# Altium PCB PCB1.PcbDoc (part 2 of 2)
Units mil, origin at the board's own origin, x right, y up, seen from the top; angles counter-clockwise.
Board outline 8130 x 4940 mil, 6 copper layers (Top Layer, TOP_GND, +5V, -5V, BOT_GND, Bottom Layer), stack 32.112 mil thick; 163 components, 155 nets, 814 pads, 428 vias.
Unrouted connection lines stored in the file: 173.
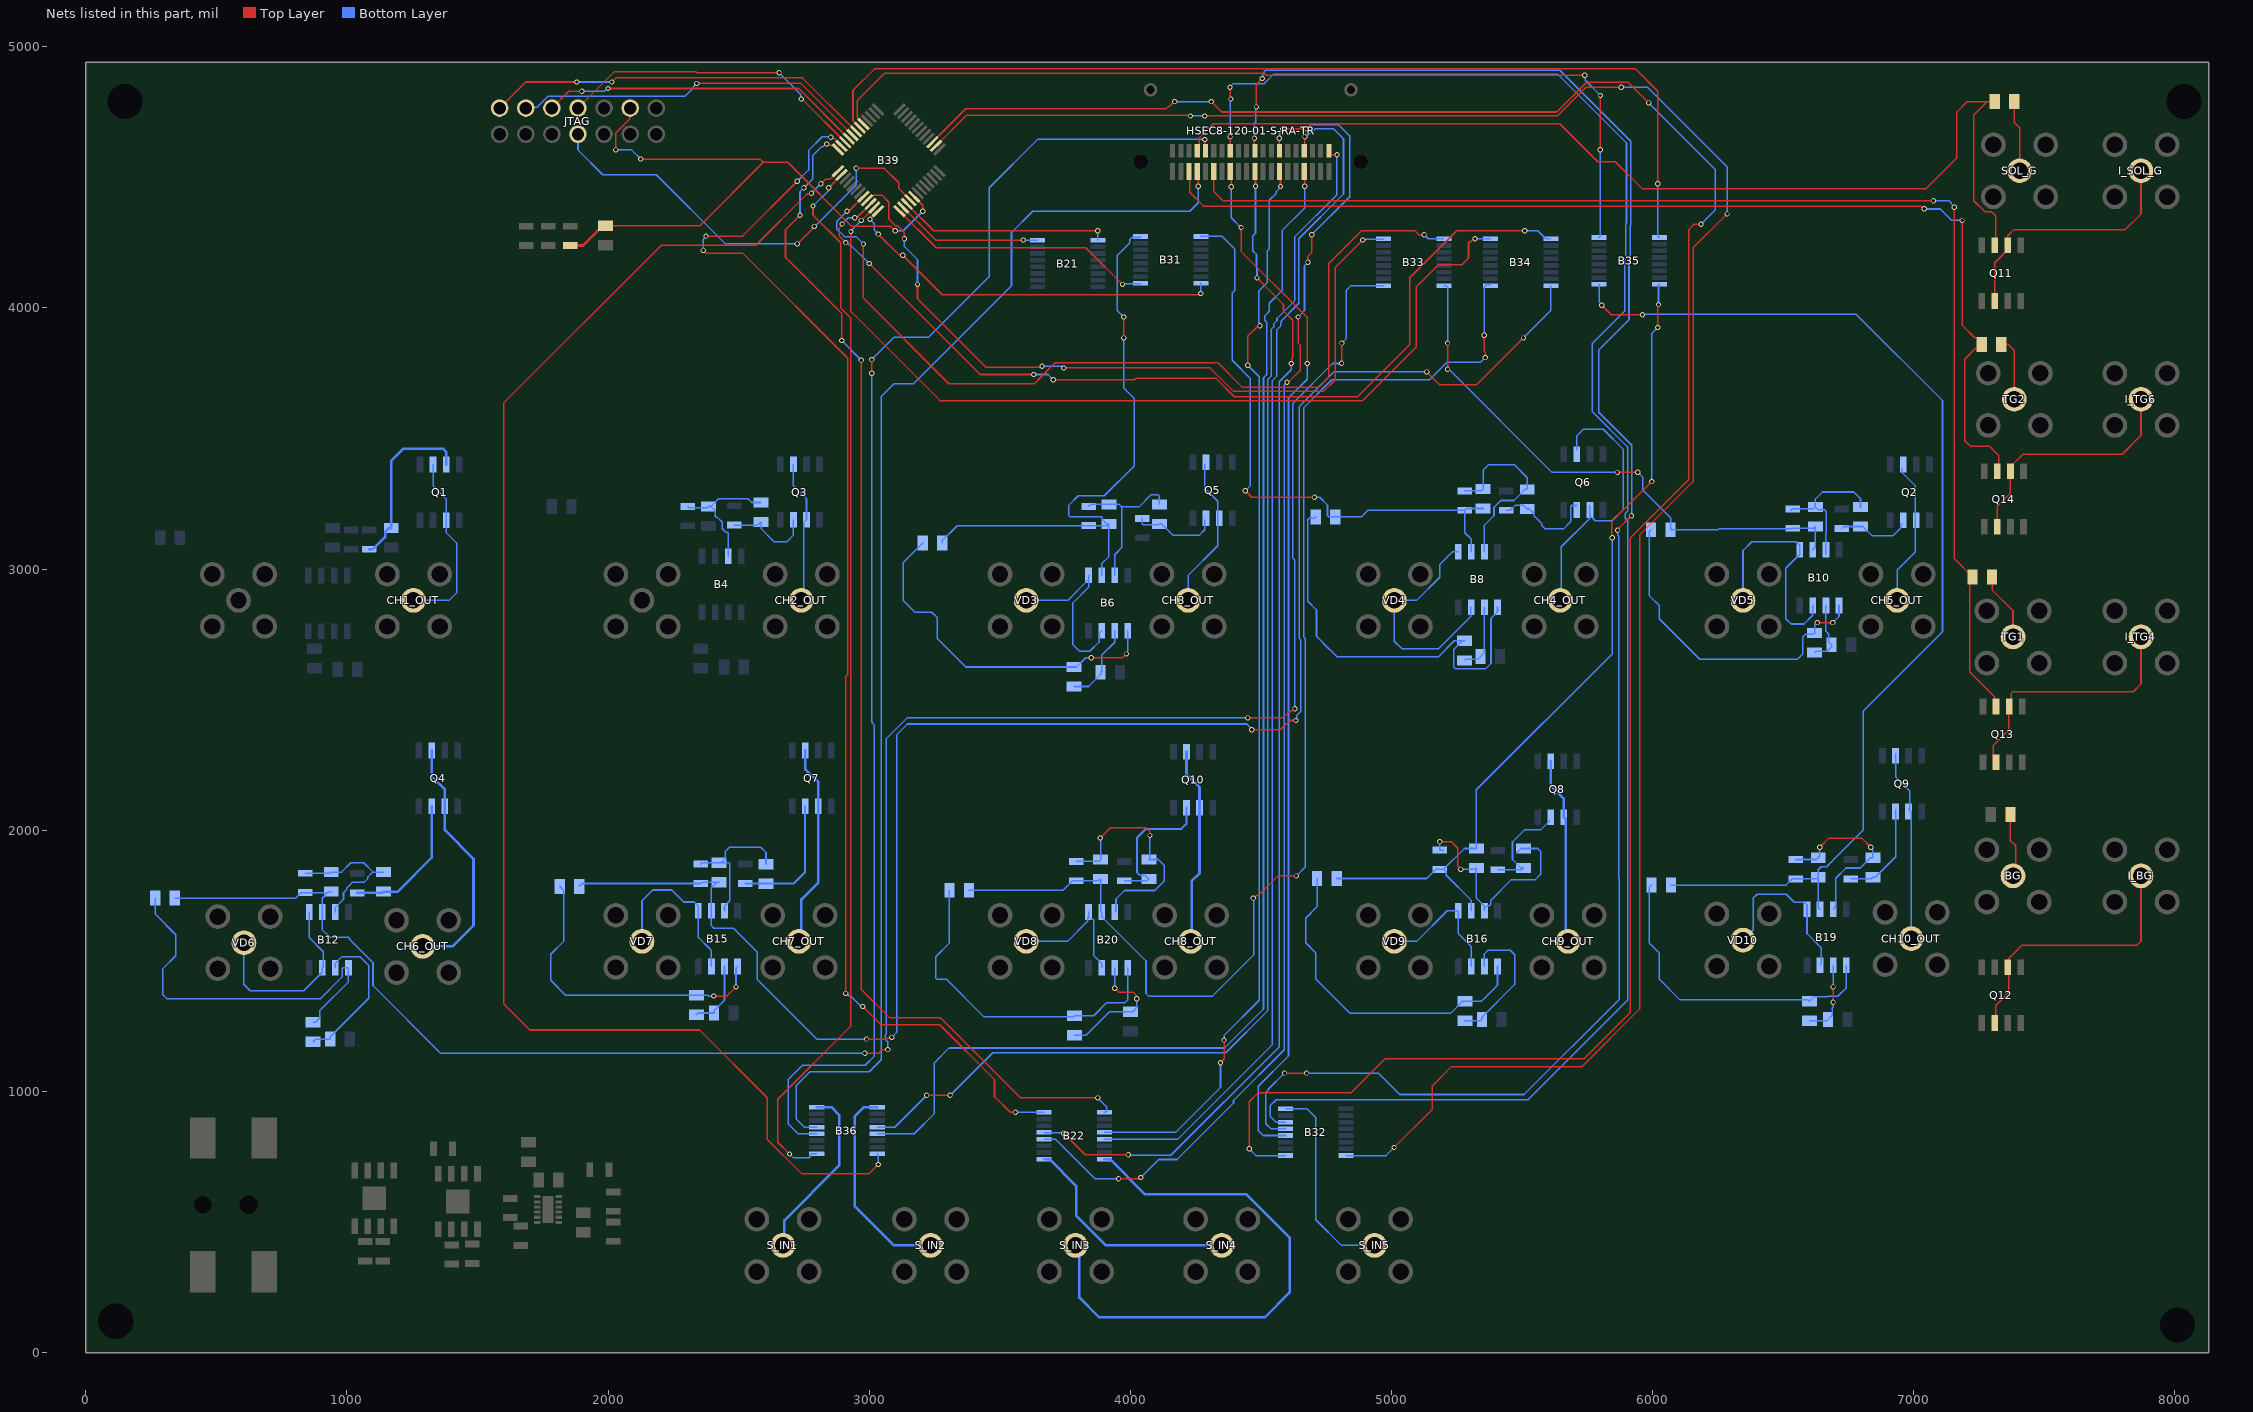
[diagram p6: the nets of this part, all layers, seen from the top]

## Via types
v1: diameter 20, hole 13, Top Layer to Bottom Layer, tented both sides, 428 vias

## Nets (pads, with @x,y where several pads share a name; then routed paths per layer and width w, separated by ;. In a path a pad name is that pad's centre, name@x,y a point inside that pad or via, vN(x,y) a via of type N, cw(c..) or ccw(c..) an arc to the next point about the centre after c; other vN are vias at no path point) (continued)
NetB4_7: B4.7 C9.2 R45.2 R47.1 | length 533.4
  Bottom Layer w6: C9.2@2305,3240 2310,3235 2325,3235 R45.2@2380.2,3235 ; B4.7@2460,3048.54 2460,3137.31 2455,3142.31 2449.34,3142.31 2437.42,3154.23 2437.42,3179.19 2418.93,3197.69 2414.06,3197.69 2410.54,3201.2 2410.54,3223.12 R45.2@2393.86,3239.8 ; R47.1@2585,3254.8 2550.2,3254.8 2536.29,3268.71 2422.76,3268.71 R45.2@2393.86,3239.8 ; R45.2@2380.2,3235 R45.2@2385,3239.8 ; R45.2@2380.2,3235 R45.2@2385,3239.8 ; R45.2@2385,3239.8 R45.2@2393.86,3239.8
NetB6_1: B6.1 R49.1 R51.2 | length 1369.6
  Top Layer w6: v1(3850,2660) 3970,2660 v1(3985,2675)
  Bottom Layer w6: R49.1@3205,3100 3130,3025 3130,2880 3175,2835 3240,2835 3260,2815 3260,2735 3370,2625 R51.2@3785,2625 3793.86,2625 3828.86,2660 v1(3850,2660) ; v1(3985,2675) 3985,2677.71 3990,2682.71 B6.1@3990,2763.23
NetB6_2: B6.2 R51.1 R53.2 | length 309.5
  Bottom Layer w6: R51.1@3785,2550.2 3840.06,2550.2 3886,2596.14 R53.2@3886,2605 3890,2609 3890,2670 3940,2720 B6.2@3940,2763.23
NetB6_3: B6.3 B6.5 VD3.1 | length 735.8
  Bottom Layer w6: VD3.1@3601,2880 3760.45,2880 B6.5@3840,2959.55 ; B6.5@3840,2976.77 B6.5@3840,2959.55 ; B6.3@3890,2763.23 3880.2,2753.43 3880.2,2720.2 3845,2685 3805,2685 3780,2710 3780,2870 3840,2930 B6.5@3840,2959.55
NetB6_6: B6.6 B31.8 C11.1 R49.2 R50.1 | length 2365.7
  Top Layer w6: v1(3975,3885) v1(3975,3965)
  Bottom Layer w6: R49.2@3279.8,3100 3279.8,3108.86 3337.17,3166.22 C11.1@3841,3166.22 3911.7,3166.22 R50.1@3918.19,3172.72 ; B6.6@3890,2976.77 3890,3020 3918.19,3048.19 R50.1@3918.19,3172.72 ; v1(3975,3885) 3975,3693.49 4015,3653.49 4015,3395 3900.2,3280.2 3800.2,3280.2 3765,3245 3765,3203.51 3768.51,3200 3889.49,3200 3893,3196.49 3893,3189.4 3909.69,3172.72 R50.1@3918.19,3172.72 ; v1(3975,3965) 3949.5,3990.5 3949.5,4155.97 3949.7,4156.17 3949.7,4200.63 3997.3,4248.22 3997.3,4262 4004.91,4269.61 4035.6,4269.61 B31.8@4039.33,4273.35
NetB6_7: B6.7 C11.2 R50.2 R52.1 | length 602.9
  Bottom Layer w6: C11.2@3841,3240.24 3848.28,3247.52 R50.2@3918.19,3247.52 3957.48,3247.52 3967.24,3237.76 ; B6.7@3940,2976.77 3940,3055 3967.24,3082.24 3967.24,3237.76 ; R52.1@4111,3247.52 4111,3279 4105,3285 4080,3285 4032.76,3237.76 3967.24,3237.76
NetB8_1: B8.1 R54.1 R56.2 | length 1612.9
  Bottom Layer w6: R54.1@4710.2,3200 4704.81,3194.61 4685.03,3194.61 4679.5,3189.08 4679.5,2876.39 4712.82,2843.07 4712.82,2742.66 4739.01,2716.48 4739.01,2715.99 4790,2665 5180.8,2665 5240.8,2725 R56.2@5271.14,2725 ; R56.2@5280,2725 R56.2@5271.14,2725 ; B8.1@5406,2853.23 5406,2836 5381.14,2811.14 5381.14,2638.52 5360.12,2617.51 5246.07,2617.51 5238.46,2625.13 5238.46,2692.31 R56.2@5271.14,2725
NetB8_2: B8.2 R56.1 R58.2 | length 261.6
  Bottom Layer w6: R56.1@5280,2650.2 5285,2655.2 5331.2,2655.2 R58.2@5341,2665 5356,2680 B8.2@5356,2853.23
NetB8_3: B8.3 B8.5 VD4.1 | length 898.4
  Bottom Layer w6: B8.5@5256,3066.77 5234.2,3066.77 5185.08,3017.65 5185.08,2968.88 5096.2,2880 VD4.1@5011,2880 5011,2724 5040,2695 5180,2695 5302.72,2817.72 5302.72,2849.95 B8.3@5306,2853.23
NetB8_6: B8.6 B31.9 C13.1 R54.2 R55.1 | length 2276.3
  Top Layer w6: v1(4440,3300) 4465,3275 v1(4705,3275)
  Bottom Layer w6: B31.9@4270.67,4273.35 4271.5,4274.17 4349.17,4274.17 4350,4275 4400.5,4224.5 4400.5,4067.49 4390,4056.99 4390,3799.1 4460,3729.1 4460,3320 v1(4440,3300) ; v1(4705,3275) 4725,3275 4755,3245 4755,3203.51 4758.51,3200 R54.2@4785,3200 4885,3200 4910.26,3225.26 C13.1@5281,3225.26 ; B8.6@5306,3066.77 5306,3114 5281,3139 C13.1@5281,3225.26 ; R55.1@5351,3231.75 5287.5,3231.75 C13.1@5281,3225.26
NetB8_7: B8.7 C13.2 R55.2 R57.1 | length 729.9
  Bottom Layer w6: C13.2@5281,3299.27 5343.72,3299.27 R55.2@5351,3306.56 5351,3379 5372,3400 5470,3400 5520,3350 R57.1@5520,3304.8 5511.14,3304.8 5468.83,3262.5 5418.17,3262.5 5392.54,3236.87 5392.54,3204.92 5356,3168.37 B8.7@5356,3066.77
NetB10_1: B10.1 R59.1 R61.2 | length 1277.5
  Top Layer w6: v1(6630,2795) v1(6690,2795)
  Bottom Layer w6: R59.1@5993.89,3150.32 5986.41,3142.84 5986.41,2898.59 6025,2860 6025,2810 6180,2655 6555,2655 6574.73,2674.73 6574.73,2739.73 6585.97,2750.97 6615.97,2750.97 R61.2@6620,2755 6620,2785 v1(6630,2795) ; v1(6690,2795) 6713.5,2818.5 B10.1@6713.5,2860.54
NetB10_2: B10.2 R61.1 R63.2 | length 241.5
  Bottom Layer w6: R61.1@6620,2680.2 6625.49,2685.69 6668.51,2685.69 6685.2,2702.37 R63.2@6685.2,2710 6674.31,2720.88 6674.31,2750.54 6663.5,2761.35 B10.2@6663.5,2860.54
NetB10_3: B10.3 B10.5 VD5.1 | length 894.8
  Bottom Layer w6: VD5.1@6346,2880 6346,3071 6380,3105 6549.81,3105 6563.5,3091.31 B10.5@6563.5,3074.08 6563.5,3056.86 6510,3003.36 6510,2810 6530.5,2789.5 6579.5,2789.5 6613.5,2823.5 B10.3@6613.5,2860.54
NetB10_6: B10.6 B33.8 C15.1 R59.2 R60.1 | length 2147.8
  Top Layer w6: v1(5215,3765) v1(5215,3865.19) ; v1(5865.15,3370.15) 5943.01,3370.15 v1(5943.17,3370.31)
  Bottom Layer w6: B33.8@5200.67,4085.43 5209.14,4085.43 5215,4079.57 v1(5215,3865.19) ; v1(5215,3765) 5220,3765 5615,3370 5865,3370 v1(5865.15,3370.15) ; v1(5943.17,3370.31) 5962.92,3350.55 5962.92,3302.08 6068.69,3196.31 R59.2@6068.69,3150.32 6250.32,3150.32 6255,3155 6534.6,3155 C15.1@6536,3156.4 6616.7,3156.4 R60.1@6623.19,3162.89 6623.19,3083.77 B10.6@6613.5,3074.08
NetB10_7: B10.7 C15.2 R60.2 R62.1 | length 570.2
  Bottom Layer w6: C15.2@6528.35,3222.76 C15.2@6536,3230.41 6615.91,3230.41 R60.2@6623.19,3237.7 ; B10.7@6663.5,3056.86 B10.7@6663.5,3074.08 6663.5,3136.59 6664.73,3137.82 6664.73,3220.27 6657.22,3227.78 6633.11,3227.78 R60.2@6623.19,3237.7 ; R62.1@6796,3237.7 6796,3269 6770,3295 6650,3295 6623.19,3268.19 R60.2@6623.19,3237.7
NetB12_1: B12.1 R64.1 R66.2 | length 1477.4
  Bottom Layer w6: R64.1@266.2,1740 266.2,1678.8 345,1600 345,1519.34 295.66,1470 295.66,1370 311.66,1354 897.97,1354 981.79,1437.82 981.79,1469.71 985.31,1473.22 B12.1@1006,1473.22 1006,1418.67 896.54,1309.22 896.54,1281.69 879.86,1265 R66.2@871,1265
NetB12_2: B12.2 R66.1 R68.2 | length 582.5
  Bottom Layer w6: R66.1@871,1190.2 880.8,1200 R68.2@936.2,1200 936.2,1208.86 1084,1356.66 1084,1481.83 1049.58,1516.24 981.8,1516.24 956,1490.45 B12.2@956,1473.22
NetB12_3: B12.3 B12.5 VD6.1 | length 755.3
  Bottom Layer w6: VD6.1@606,1569.29 605,1568.29 605,1410 630,1385 835,1385 906,1456 B12.3@906,1473.22 910,1477.22 910,1535 856,1589 B12.5@856,1686.77
NetB12_6: B12.6 B33.9 C17.1 R64.2 R65.1 | length 7849
  Top Layer w6: v1(2983.67,1146.33) 3036.33,1146.33 3050,1160 v1(3071,1160) ; v1(4450,2430) 4584.63,2430 4609.27,2454.64 4616.28,2454.64 4626.44,2464.8 v1(4630.23,2464.8) ; v1(4808.92,3787.91) 4809.46,3788.45 4809.46,3844.46 4810,3845 v1(4810,3865.19)
  Bottom Layer w6: R64.2@341,1740 804.45,1740 825.43,1760.98 C17.1@840,1760.98 R65.1@927.13,1760.98 ; R65.1@940,1765 931.14,1765 R65.1@927.13,1760.98 ; v1(2983.67,1146.33) 1358.67,1146.33 1100,1405 1100,1491.97 1010,1581.97 1010,1586.49 1006.49,1590 935,1590 905,1620 905,1685.77 B12.6@906,1686.77 906,1739.86 R65.1@927.13,1760.98 ; v1(3071,1160) 3071,1189.66 3062.08,1198.58 3062.08,1215.46 3066,1219.38 3066,2351 3145,2430 v1(4450,2430) ; v1(4630.23,2464.8) 4630.23,3033.41 4621.73,3041.91 4621.73,3634.25 4774.47,3787 4808.01,3787 v1(4808.92,3787.91) ; v1(4810,3865.19) 4826,3881.19 4826,4066 4845.43,4085.43 B33.9@4969.33,4085.43
NetB12_7: B12.7 C17.2 R65.2 R67.1 | length 570.5
  Bottom Layer w6: C17.2@840,1835 935.2,1835 R65.2@940,1839.8 979.8,1839.8 1015,1875 1065,1875 1100.2,1839.8 ; B12.7@956,1686.77 956,1703.99 987.16,1735.15 987.16,1760.83 999.24,1772.92 999.24,1778.57 1020.67,1800 1065.31,1800 1080.76,1815.44 1080.76,1821.1 1099.46,1839.8 1100.2,1839.8 ; R67.1@1140,1839.8 1100.2,1839.8
NetB15_1: B15.1 R69.1 R73.2 | length 1215.9
  Top Layer w6: v1(2405,1365) 2455,1365 v1(2490,1400)
  Bottom Layer w6: R69.1@1815.2,1785 1829.87,1770.32 1829.87,1574.21 1780.66,1525 1780.66,1425 1837.62,1368.04 R73.2@2338.17,1368.04 2383.04,1368.04 2386.08,1365 v1(2405,1365) ; v1(2490,1400) 2490,1472.22 B15.1@2496,1478.22
NetB15_2: B15.2 R73.1 R76.2 | length 265.4
  Bottom Layer w6: R73.1@2338.17,1293.23 2344.93,1300 R76.2@2406,1300 2406,1308.86 2446,1348.86 B15.2@2446,1478.22
NetB15_3: B15.3 B15.5 VD7.1 | length 665.9
  Bottom Layer w6: VD7.1@2130,1574.29 2130,1730 2171,1771 2243.7,1771 2289.7,1725 2329.99,1725 2346,1708.99 B15.5@2346,1691.77 2346,1641.03 ; 2346,1641 2346,1589 2389.4,1545.59 2396,1539 B15.3@2396,1478.22
NetB15_6: B15.6 B34.8 C19.1 R69.2 R70.1 | length 6853.9
  Top Layer w6: v1(2990,1200) 3065.18,1200 3069.09,1203.91 3083.91,1203.91 v1(3086.59,1206.59) ; v1(4465,2385) 4509.58,2385 4574,2385 4596.36,2407.36 4599.36,2407.36 4612,2420 v1(4634,2420) ; v1(5135,3755) 5185,3705 5325,3705 v1(5505,3885)
  Bottom Layer w6: R69.2@1890,1785 1900.98,1795.98 C19.1@2355,1795.98 2359.21,1800.2 R70.1@2416.14,1800.2 ; R70.1@2425,1800.2 R70.1@2416.14,1800.2 ; v1(2990,1200) 2800,1200 2570.76,1429.24 2570.76,1534.24 2480,1625 2405,1625 2395,1635 2395,1690.77 B15.6@2396,1691.77 2396,1780.06 R70.1@2416.14,1800.2 ; v1(3086.59,1206.59) 3105,1225 3105,2365 3146.68,2406.68 4446.02,2406.68 4465,2387.71 v1(4465,2385) ; v1(4634,2420) 4636.68,2422.68 4636.68,2438.73 4653.23,2455.27 4653.23,2728.06 4647.5,2733.79 4647.5,3623.51 4778.99,3755 v1(5135,3755) ; v1(5505,3885) 5610.67,3990.67 B34.8@5610.67,4085.43
NetB15_7: B15.7 C19.2 R70.2 R75.1 | length 577.7
  Bottom Layer w6: C19.2@2355,1870 2360,1875 R70.2@2425,1875 ; B15.7@2446,1691.77 2446,1708.99 2466.54,1729.54 2466.54,1871.49 2463.03,1875 R70.2@2432.79,1875 ; R75.1@2605,1870 2605,1915 2585,1935 2465,1935 2449.48,1919.48 2449.48,1891.69 R70.2@2432.79,1875 ; R70.2@2425,1875 R70.2@2432.79,1875 ; R70.2@2425,1875 R70.2@2432.79,1875
NetB16_1: B16.1 R71.1 R74.2 | length 1287.2
  Bottom Layer w6: R71.1@4715.2,1815 4715.2,1707.03 4671.41,1663.24 4671.41,1568.59 4710,1530 4710,1430 4840,1300 4840,1298.51 5225.85,1298.51 5272.14,1344.8 R74.2@5281,1344.8 5344.8,1344.8 5406,1406 B16.1@5406,1478.22
NetB16_2: B16.2 R74.1 R78.2 | length 544.4
  Bottom Layer w6: R74.1@5281,1270 5341.2,1270 R78.2@5346.2,1275 5346.2,1283.86 5471.49,1409.15 5471.49,1525 5470,1525 5455,1540 5370,1540 5356,1526 B16.2@5356,1478.22
NetB16_3: B16.3 B16.5 VD9.1 | length 527.9
  Bottom Layer w6: VD9.1@5011,1574.29 5096.2,1574.29 5213.67,1691.77 B16.5@5256,1691.77 5256,1604 5306,1554 B16.3@5306,1478.22
NetB16_6: B16.6 B35.8 C20.1 R71.2 R72.1 | length 3241
  Top Layer w6: v1(5845,3120) 5842.77,3122.23 5842.77,3180.77 v1(5997,3335) ; v1(6020,3925) 6020,4010 v1(6022.5,4012.5) v1@6025,4015
  Bottom Layer w6: R71.2@4790,1815 5135.43,1815 5170.43,1850 C20.1@5185,1850 C20.1@5199.57,1850 ; B16.6@5306,1691.77 5306,1731.18 5209.76,1827.42 5209.76,1839.81 C20.1@5199.57,1850 ; v1(5845,3120) 5845,2675 5325,2155 R72.1@5325,1930 5279.57,1930 C20.1@5199.57,1850 ; v1(5997,3335) 5997,3902 v1(6020,3925) ; v1(6022.5,4012.5) 6022.5,4087.26 B35.8@6025.67,4090.43
NetB16_7: B16.7 C20.2 R72.2 R77.1 | length 951.9
  Top Layer w6: v1(5185,1956.3) 5228.7,1956.3 5253.7,1931.3 5253.7,1861.3 v1(5265,1850)
  Bottom Layer w6: v1(5185,1956.3) C20.2@5185,1924.02 C20.2@5199.57,1924.02 ; v1(5265,1850) 5319.8,1850 R72.2@5325,1855.2 5325,1739.99 5356,1708.99 B16.7@5356,1700.25 ; B16.7@5356,1691.77 B16.7@5356,1700.25 ; B16.7@5356,1700.25 5365.8,1710.05 5374.28,1710.05 5380.2,1715.97 5380.2,1731.27 5460,1811.07 5551.07,1811.07 5571.04,1831.04 5571.04,1918.96 5560,1930 R77.1@5505,1930 ; R77.1@5496.14,1930 R77.1@5505,1930 ; R77.1@5496.14,1930 5479.46,1913.31 R77.1@5496.14,1930 ; R77.1@5496.14,1930 R77.1@5505,1930
NetB19_1: B19.1 R79.1 R83.2 | length 1239.3
  Bottom Layer w6: R79.1@5995.54,1790 5986.41,1780.87 5986.41,1568.59 6025,1530 6025,1430 6105,1350 6596,1350 R83.2@6601,1345 6617.69,1361.69 6666.61,1361.69 6668.93,1364 6709,1364 6741,1396 B19.1@6741,1483.22
NetB19_2: B19.2 R83.1 R86.2 | length 288.6
  Top Layer w6: v1(6691,1341) v1(6691,1399.88)
  Bottom Layer w6: R83.1@6601,1270.2 6666.39,1270.2 R86.2@6671.2,1275 6687.88,1291.69 6687.88,1318.88 6691,1322 v1(6691,1341) ; v1(6691,1399.88) B19.2@6691,1483.22
NetB19_3: B19.3 B19.5 VD10.1 | length 660.7
  Bottom Layer w6: VD10.1@6346,1579.29 6385.76,1619.08 6385.76,1740.45 6400.3,1755 6511.15,1755 6542.36,1723.79 6581.2,1723.79 6591,1713.99 B19.5@6591,1696.77 6591,1604 6645,1550 6645,1487.22 B19.3@6641,1483.22
NetB19_6: B19.6 B35.9 C23.1 R79.2 R80.1 | length 4278.6
  Top Layer w6: v1(5805,4010) 5841.26,3973.74 v1(5961.26,3973.74)
  Bottom Layer w6: B35.9@5794.33,4090.43 5795,4089.76 5795,4022.44 5805,4012.44 v1(5805,4010) ; v1(5961.26,3973.74) 5962.53,3975 6780,3975 7110,3645 7110,2760 6807,2457 6807,2002 6675.85,1870.85 6675.85,1869.93 6668.24,1862.31 6667.31,1862.31 6665.23,1860.23 6645.66,1860.23 6634.31,1848.88 R80.1@6634.31,1820.2 ; R79.2@6070.34,1790 6510.64,1790 6534.34,1813.7 C23.1@6548.91,1813.7 6627.82,1813.7 R80.1@6634.31,1820.2 ; B19.6@6641,1696.77 6634.31,1703.46 R80.1@6634.31,1820.2
NetB19_7: B19.7 C23.2 R80.2 R85.1 | length 696.9
  Top Layer w6: v1(6640,1935) 6675,1970 6800,1970 v1(6835,1935)
  Bottom Layer w6: C23.2@6548.91,1887.72 6627.03,1887.72 R80.2@6634.31,1895 6640,1900.69 v1(6640,1935) ; B19.7@6691,1696.77 6700.8,1706.56 6700.8,1815.69 6740.4,1855.29 6794.97,1855.29 6834.68,1895 R85.1@6843.54,1895 6843.54,1923.76 6835,1932.29 v1(6835,1935)
NetB20_1: B20.1 R81.1 R84.2 | length 1305.6
  Bottom Layer w6: R81.1@3307.31,1770 3307.31,1567.85 3254.46,1515 3254.46,1433.51 3257.98,1430 3295,1430 3440,1285 3781.2,1285 R84.2@3786,1289.8 3859.8,1289.8 3910,1340 3980,1340 3990,1350 B20.1@3990,1473.23
NetB20_2: B20.2 R84.1 R88.2 | length 502.5
  Top Layer w6: v1(3940,1395) 3955,1380 4010,1380 4023.98,1366.02 4023.98,1356.02 v1(4025,1355)
  Bottom Layer w6: R84.1@3786,1215 3830.37,1215 3920.37,1305 4008.86,1305 4025,1321.14 v1(4025,1355) ; v1(3940,1395) B20.2@3940,1473.23
NetB20_3: B20.3 B20.5 VD8.1 | length 525.2
  Bottom Layer w6: VD8.1@3601,1574.29 3759.29,1574.29 3836.27,1651.27 3836.27,1665.81 B20.5@3840,1669.55 ; B20.5@3840,1686.77 B20.5@3840,1669.55 ; B20.3@3890,1473.23 3890,1490.45 3860,1520.45 3860,1656.24 3856.49,1659.75 3849.8,1659.75 B20.5@3840,1669.55
NetB20_6: B20.6 B34.9 C24.1 R81.2 R82.1 | length 4814.8
  Top Layer w6: v1(4471,1740) 4474.76,1740 4486.31,1751.56 4491.56,1751.56 4565,1825 v1(4636,1825) ; v1(5355,3895) 5355,3835 5358.69,3831.31 v1(5358.69,3809.7)
  Bottom Layer w6: R81.2@3382.12,1770 3741.79,1770 3778.19,1806.4 C24.1@3792.76,1806.4 3879.45,1806.4 R82.1@3885.94,1812.89 3885.94,1690.83 B20.6@3890,1686.77 3890,1669.55 4060,1499.55 4060,1375 4070,1365 4315,1365 4472,1522 4472,1739 v1(4471,1740) ; v1(4636,1825) 4669.23,1858.23 4669.23,2734.69 4663.5,2740.41 4663.5,3616.88 4771.62,3725 5146.01,3725 5213.51,3792.5 5341.49,3792.5 v1(5358.69,3809.7) ; v1(5355,3895) 5355,4079.57 5364.59,4089.17 B34.9@5380,4089.17
NetB20_7: B20.7 C24.2 R82.2 R87.1 | length 894.3
  Top Layer w6: v1(3885,1970) 3925,2010 4060,2010 4075,1995 v1(4075,1980)
  Bottom Layer w6: C24.2@3792.76,1880.41 3878.66,1880.41 R82.2@3885.94,1887.7 3885.94,1969.06 v1(3885,1970) ; B20.7@3940,1686.77 3945,1691.77 3945,1736.49 3977.51,1769 4093.47,1769 4130,1805.53 4130,1865 4107.3,1887.7 R87.1@4070.75,1887.7 4075,1891.95 v1(4075,1980)
NetB21_1: B21.1 B39.3 | length 809.2
  Top Layer w6: B39.3@3144.26,4398.3 3247.56,4295 v1(3875,4295)
  Bottom Layer w6: v1(3875,4295) 3875.67,4294.33 B21.1@3875.67,4259.57
NetB21_16: B21.16 B39.2 | length 566.3
  Top Layer w6: B39.2@3130.34,4384.38 3255.43,4259.29 3589.29,4259.29 v1(3590,4260)
  Bottom Layer w6: v1(3590,4260) 3590.22,4259.78 3644.11,4259.78 B21.16@3644.33,4259.57
NetB22_1: B22.1 B39.36 | length 4633
  Top Layer w6: v1(2735,4355) 2679.5,4299.5 2679.5,4193.78 2895,3978.28 v1(2895,3875) ; v1(2837.78,4627.5) 2841.57,4627.5 2846.29,4622.78 2864.11,4622.78 B39.36@2880.46,4606.42 ; v1(2970,3800) 2970,1390 3077.5,1282.5 3272.5,1282.5 3580,975 v1(3875,975)
  Bottom Layer w6: v1(2735,4355) 2735,4445 v1(2750,4460) 2784,4494 2784,4584 2817.09,4617.09 2823.58,4617.09 2834,4627.5 v1(2837.78,4627.5) ; v1(2895,3875) v1(2970,3800) ; v1(3875,975) 3910,940 3910,925.43 3904.14,919.57 B22.1@3901.21,919.57
NetB22_8: B22.8 S_IN3.1 | length 2124.9
  Bottom Layer w10: S_IN3.1@3790,410 3805,395 3805,210 3880,135 4515,135 4610,230 4610,440 4444.21,605.79 4056.03,605.79 3921.39,740.43 B22.8@3901.21,740.43
NetB22_9: B22.9 S_IN4.1 | length 883.1
  Bottom Layer w10: B22.9@3669.87,740.43 3690.05,740.43 3792.69,637.8 3792.69,524.94 3907.63,410 S_IN4.1@4350,410
NetB22_16: B22.16 B39.35 | length 4939.5
  Top Layer w6: v1(2365,4220) 2375,4210 2515,4210 2918,3807 2918,2596.64 2910.5,2589.14 v1(2910.5,1375) ; v1(2375,4275) 2515,4275 v1(2725,4485) ; v1(2853.45,4653.09) 2856.12,4650.41 2864.32,4650.41 B39.35@2894.38,4620.34 ; v1(2975,1325) 3045,1255 3270,1255 3480,1045 3480,980 3540,920 v1(3560,920)
  Bottom Layer w6: v1(2365,4220) 2365,4262.56 2375,4272.56 v1(2375,4275) ; v1(2725,4485) 2768,4528 2768,4603 2820,4655 2851.53,4655 v1(2853.45,4653.09) ; v1(2910.5,1375) 2914.29,1375 2925.09,1364.19 2930.81,1364.19 2970,1325 v1(2975,1325) ; v1(3560,920) 3560.22,919.78 3669.66,919.78 B22.16@3669.87,919.57
NetB31_1: B31.1 B39.1 | length 1040.4
  Top Layer w6: B39.1@3116.42,4370.46 3256.39,4230.5 3829.5,4230.5 v1(3970,4090)
  Bottom Layer w6: v1(3970,4090) 3971.72,4091.72 4037.5,4091.72 B31.1@4039.22,4090
NetB31_16: B31.16 B39.48 | length 1486.5
  Top Layer w6: v1(3003.29,4339.23) 3003.29,4339.71 3033.58,4369.99 B39.48@3033.58,4370.46 ; v1(3035,4282.47) 3113.46,4204.02 3126.25,4204.02 v1(3128.93,4201.34) 3280.27,4050 4262.56,4050 4267.56,4055 v1(4270,4055)
  Bottom Layer w6: v1(3003.29,4339.23) 3019.15,4323.38 3019.15,4298.33 v1(3035,4282.47) ; v1(4270,4055) 4270,4093.54 B31.16@4270.67,4094.21
NetB32_1: B32.1 B39.15 | length 8573.2
  Top Layer w6: B39.15@3241.7,4634.26 3369.75,4762.31 4135.93,4762.31 4137.59,4763.66 v1(4170,4790) ; v1(4310,4790) 4350,4750 5633.03,4750 5747.53,4864.5 5905.5,4864.5 v1(5985,4785) ; v1(4455,780) 4455,960 4488.96,993.96 4843.96,993.96 4974.97,1124.97 5737.34,1124.97 5915,1302.63 5915,3120 6139,3344 6139,4300.62 6158.38,4320 v1(6185,4320)
  Bottom Layer w6: v1(4170,4790) v1(4310,4790) ; v1(4455,780) 4480.79,754.21 B32.1@4594.33,754.21 ; v1(5985,4785) 6240,4530 6240,4375 v1(6185,4320)
NetB32_8: B32.8 S_IN5.1 | length 786.8
  Bottom Layer w6: B32.8@4594.33,933.35 4676.65,933.35 4710,900 4710,508.45 4808.45,410 S_IN5.1@4935,410
NetB32_16: B32.16 B39.14 | length 8023.4
  Top Layer w6: B39.14@3255.62,4620.34 3372.16,4736.88 4228.12,4736.88 v1(4230,4735) ; v1(4285,4735) 5635,4735 5745,4845 v1(5880,4845) ; v1(5010,785) 5155.96,930.96 5155.96,1020.96 5230,1095 5730,1095 5950,1315 5950,3130 6155,3335 6155,4230 v1(6285,4360)
  Bottom Layer w6: v1(4230,4735) v1(4285,4735) ; B32.16@4825.67,754.21 4979.21,754.21 v1(5010,785) ; v1(5880,4845) 5980,4845 6285,4540 v1(6285,4360)
NetB33_1: B33.1 B39.44 | length 3451
  Top Layer w6: v1(2915,4370) 2921.76,4370 B39.44@2977.9,4426.14 ; v1(2977.9,4244.57) 2977.9,4037.1 3305,3710 3632.58,3710 3660.5,3737.92 3660.5,3738.08 3711.92,3789.5 4335.5,3789.5 4429.5,3695.5 4720.5,3695.5 4760,3735 4760,4170 4885,4295 5090,4295 5106.21,4278.79 5123.79,4278.79 v1(5125,4280)
  Bottom Layer w6: v1(2915,4370) 2875,4330 2875,4303.51 2905.28,4273.23 2949.24,4273.23 v1(2977.9,4244.57) ; v1(5125,4280) 5140.43,4264.57 B33.1@5200.67,4264.57
NetB33_16: B33.16 B39.45 | length 2956.1
  Top Layer w6: B39.45@2991.82,4412.22 2995.93,4412.22 3015.71,4432.01 3047.99,4432.01 3049.98,4430.02 3075,4405 3075,4340 3100.5,4314.5 3108.08,4314.5 3135,4287.58 v1(3135,4265) ; v1(3185,4090) 3185,4035 3445,3775 3445,3773.51 3658.51,3773.51 v1(3661.76,3776.76) v1@3665,3780 ; v1(3745,3770) 4305,3770 4395,3680 4740,3680 4785,3725 4785,4155 v1(4890,4260)
  Bottom Layer w6: v1(3135,4265) 3135,4235 3185,4185 v1(3185,4090) ; v1(3661.76,3776.76) 3738.24,3776.76 v1(3745,3770) ; v1(4890,4260) 4892.28,4262.28 4967.05,4262.28 B33.16@4969.33,4264.57
NetB34_1: B34.1 B39.46 | length 3601.6
  Top Layer w6: v1(2896.21,4321.21) 2896.21,4317.42 2885,4306.21 2885,4275.5 v1(2910.5,4250) ; v1(2945,4345) 2952.42,4345 B39.46@3005.74,4398.3 ; v1(3000,4170) 3425,3745 v1(3630,3745) ; v1(3705,3725) 4015.91,3725 4020.91,3730 4328.03,3730 4398.03,3660 4870,3660 5070,3860 5070,4115 5250,4295 v1(5510,4295)
  Bottom Layer w6: v1(2896.21,4321.21) 2920,4345 v1(2945,4345) ; v1(2910.5,4250) 2914.29,4250 2925.09,4239.19 2930.81,4239.19 v1(3000,4170) ; v1(3630,3745) 3685,3745 v1(3705,3725) ; v1(5510,4295) 5560.06,4295 5590.49,4264.57 B34.1@5610.67,4264.57
NetB34_16: B34.16 B39.47 | length 3452.9
  Top Layer w6: v1(2930,4292.73) 2930,3986.31 3271.31,3645 4890,3645 5095,3850 5095,4080 5180.94,4165.94 5270.94,4165.94 5295,4190 5295,4250 5299.24,4254.24 5305.45,4254.24 5316.21,4265 v1(5320,4265) ; v1(2970,4335) 2970.14,4335 3019.52,4384.38 B39.47@3019.66,4384.38
  Bottom Layer w6: v1(2930,4292.73) 2930,4295 v1(2970,4335) ; v1(5320,4265) 5320.22,4264.78 5379.11,4264.78 B34.16@5379.33,4264.57
NetB35_1: B35.1 B39.30 | length 3867.7
  Top Layer w6: B39.30@2963.98,4689.94 2963.98,4691.04 2938.11,4716.91 2938.11,4833.11 3020,4915 5935,4915 6020,4830 v1(6020,4475)
  Bottom Layer w6: v1(6020,4475) 6020,4275.24 B35.1@6025.67,4269.57
NetB35_16: B35.16 B39.29 | length 3580.3
  Top Layer w6: B39.29@2977.9,4703.86 2977.9,4704.96 2954.11,4728.75 2954.11,4794.11 3058,4898 4513.08,4898 4520.58,4890.5 v1(5740,4890.5) ; v1(5799.26,4605.67) 5799.26,4654.5 5800,4655.24 v1(5800,4813.5)
  Bottom Layer w6: v1(5740,4890.5) 5742,4888.5 5742,4871.5 v1(5800,4813.5) ; B35.16@5794.33,4269.57 5799.26,4274.5 v1(5799.26,4605.67)
NetB36_1: B36.1 B39.38 | length 4110.1
  Top Layer w6: v1(2695,760) 2650,805 2650,970 2930,1250 2930,3960.25 2891,3999.25 2891,4249 2785,4355 v1(2785,4390) ; v1(2845,4460) 2845,4460.14 2894.38,4509.52 B39.38@2894.38,4509.66
  Bottom Layer w6: v1(2695,760) 2710,745 2769.78,745 2773.3,748.51 2773.3,754.57 2779.15,760.43 B36.1@2799.33,760.43 ; v1(2785,4390) 2843.09,4448.09 2843.09,4458.09 v1(2845,4460)
NetB36_8: B36.8 S_IN1.1 | length 687
  Bottom Layer w10: S_IN1.1@2670,410 2675,415 2675,506.28 2885,716.28 2885,910 2855.43,939.57 B36.8@2799.33,939.57
NetB36_9: B36.9 S_IN2.1 | length 797.4
  Bottom Layer w10: B36.9@3030.67,939.57 2979.57,939.57 2945,905 2945,559.52 3094.52,410 S_IN2.1@3235,410
NetB36_16: B36.16 B39.37 | length 5803.2
  Top Layer w6: v1(2778.71,4438.71) 2776.03,4436.03 2761.85,4436.03 2565.82,4240 2204.54,4240 1600,3635.46 1600,1335 1700,1235 2350.46,1235 2610,975.46 2610,816.01 2741.01,685 3000,685 v1(3035,720) ; v1(2815,4475) 2831.91,4491.91 2848.8,4491.91 B39.37@2880.46,4523.58
  Bottom Layer w6: v1(2778.71,4438.71) v1(2815,4475) ; B36.16@3030.67,760.43 3035,756.1 v1(3035,720)
NetB39_4: B39.4 JTAG.8 | length 1705.8
  Top Layer w6: v1(2725,4245) 2789.51,4309.51 v1(2789.51,4312.15) ; v1(2950,4535) 3056.94,4535 3112.87,4479.07 3112.87,4457.59 3158.18,4412.27 B39.4@3158.18,4412.22
  Bottom Layer w6: JTAG.8@1885,4665 1885,4605 1980,4510 2185,4510 2450,4245 v1(2725,4245) ; v1(2789.51,4312.15) 2792.15,4312.15 2800,4320 2800.46,4320 2950,4469.54 v1(2950,4535)
NetB39_5: B39.5 C44.1 JTAG.3 R37.2 | length 2458.6
  Top Layer w6: R37.2@1990,4315 2351.93,4315 2594.21,4557.28 ; v1(2030,4605) 2030,4670.1 2082.4,4722.5 2082.4,4762.4 JTAG.3@2085,4765 ; v1(2125,4570) 2581.49,4570 2594.21,4557.28 ; v1(3100,4295) 3083,4312 2933,4312 2687.72,4557.28 2594.21,4557.28 ; B39.5@3172.1,4426.14 3205.05,4393.2 v1(3205.05,4370.05)
  Top Layer w10: C44.1@1854.55,4238.8 1904.94,4238.8 1981.14,4315 R37.2@1990,4315
  Bottom Layer w6: v1(2030,4605) 2090,4605 v1(2125,4570) ; v1(3100,4295) 3130,4295 v1(3205.05,4370.05)
NetBG_1: BG.1 R2.1 | length 247.4
  Top Layer w6: R2.1@7370,2060 7370,1960 7390,1940 7390,1835 BG.1@7380,1825
NetC8_1: C8.1 Q1.3 R42.2 | length 669.9
  Bottom Layer w10: C8.1@1085,3075.98 1099.57,3075.98 1146.46,3122.87 1146.46,3142.6 1161.14,3157.28 R42.2@1170,3157.28 1170,3415 1215,3460 1369.14,3460 1380,3449.14 Q1.3@1380,3400.32
NetC10_1: C10.1 Q3.3 R47.2 | length 346.1
  Bottom Layer w6: C10.1@2482.48,3168.5 2573.5,3168.5 2580.15,3175.15 R47.2@2585,3180 2585.92,3179.08 2585.92,3154.83 2635.75,3105 2685,3105 2710,3130 Q3.3@2710,3188.23
NetC12_1: C12.1 Q5.3 R52.2 | length 328.7
  Bottom Layer w6: C12.1@4045,3194.02 4045,3172.53 4048.51,3169.02 4107.3,3169.02 R52.2@4111,3172.72 4119.86,3172.72 4162.57,3130 4265,3130 4285,3150 Q5.3@4285,3188.23
NetC14_1: C14.1 Q6.3 R57.2 | length 395.2
  Bottom Layer w6: C14.1@5440,3225 5454.57,3225 5473.24,3243.67 5506.33,3243.67 R57.2@5520,3230 5527.79,3230 5544.48,3213.31 5544.48,3205.52 5575.8,3174.2 5575.8,3167.18 5589.16,3153.82 5658.82,3153.82 5685.8,3180.8 5685.8,3239.71 5689.31,3243.23 Q6.3@5710,3243.23
NetC16_1: C16.1 Q2.3 R62.2 | length 282.4
  Bottom Layer w6: Q2.3@6955,3173.23 6950.2,3168.43 6950.2,3157.23 6920.97,3128 6839.75,3128 6804.86,3162.89 R62.2@6796,3162.89 C16.1@6731.91,3162.89 ; C16.1@6731.91,3162.89 C16.1@6725,3155.98 C16.1@6731.91,3162.89
NetC18_1: C18.1 Q4.3 R67.2 | length 538.1
  Bottom Layer w10: C18.1@1040,1760 1135,1760 R67.2@1140,1765 1183.54,1765 1184.4,1764.14 1194.14,1764.14 1325,1895 Q4.3@1325,2091.46
NetC21_1: C21.1 Q7.3 R75.2 | length 509.7
  Bottom Layer w6: C21.1@2525,1795.98 2605,1795.98 R75.2@2614.65,1795.98 ; R75.2@2605,1795.2 R75.2@2614.65,1795.2
  Bottom Layer w8: R75.2@2614.65,1795.2 2710.2,1795.2 2755,1840 Q7.3@2755,2091.46
NetC22_1: C22.1 Q8.3 R77.2 | length 399.7
  Bottom Layer w6: C22.1@5407.81,1848.7 5498.5,1848.7 R77.2@5505,1855.2 5496.14,1855.2 5463.46,1887.88 5463.46,1955.07 5509.38,2000.99 5570.28,2000.99 Q8.3@5606.84,2037.55
NetC26_1: C26.1 Q9.3 R85.2 | length 388.2
  Bottom Layer w6: C26.1@6758.14,1813.7 6837.04,1813.7 R85.2@6843.54,1820.2 6852.39,1820.2 6931,1898.8 Q9.3@6931,2078.93
NetC27_1: C27.1 Q10.3 R87.2 | length 558
  Bottom Layer w6: C27.1@3977.56,1806.4 4064.25,1806.4 R87.2@4070.75,1812.89 4056.85,1826.8 4036.72,1826.8 4033.94,1829.58 4025,1838.51
  Bottom Layer w8: 4025,1838.51 4025,1970 4060,2005 4195,2005 4215,2025 Q10.3@4215,2086.46
NetCH1_OUT_1: CH1_OUT.1 Q1.2 Q1.6 | length 705.9
  Bottom Layer w6: CH1_OUT.1@1255,2880 1391.49,2880 1420,2908.51 1420,3100 1380,3140 Q1.6@1380,3186.77 1380,3268.51 1330,3318.51 Q1.2@1330,3400.32
NetCH2_OUT_1: CH2_OUT.1 Q3.2 Q3.6 | length 550.8
  Bottom Layer w6: Q3.6@2710,3401.77 2710,3320 2760,3270 Q3.2@2760,3188.23 2750.2,3178.43 2750.2,2890.2 CH2_OUT.1@2740,2880
NetCH3_OUT_1: CH3_OUT.1 Q5.2 Q5.6 | length 589.7
  Bottom Layer w6: CH3_OUT.1@4221,2880 4221,2975.58 4335,3089.58 4335,3188.23 4335,3260 4285,3310 Q5.6@4285,3401.77
NetCH4_OUT_1: CH4_OUT.1 Q6.2 Q6.6 | length 1068
  Bottom Layer w6: CH4_OUT.1@5646,2880 5650,2884 5650,3085 5760,3195 Q6.2@5760,3205 ; Q6.6@5710,3456.77 5710,3510 5735,3535 5810.83,3535 5888.15,3457.67 5888.15,3228.15 5845,3185 5780,3185 Q6.2@5760,3205 ; Q6.2@5760,3243.23 Q6.2@5760,3205
NetCH5_OUT_1: CH5_OUT.1 Q2.2 Q2.6 | length 556.1
  Bottom Layer w6: CH5_OUT.1@6936,2880 6936,2995.08 7005,3064.08 7005,3173.23 7005,3319.55 6955,3369.55 Q2.6@6955,3386.77
NetCH6_OUT_1: CH6_OUT.1 Q4.2 Q4.6 | length 964.4
  Bottom Layer w10: CH6_OUT.1@1290,1555 1405,1555 1485,1635 1485,1890 1375,2000 Q4.2@1375,2091.46 1375,2155 1325,2205 Q4.6@1325,2305
NetCH7_OUT_1: CH7_OUT.1 Q7.2 Q7.6 | length 782.1
  Bottom Layer w10: CH7_OUT.1@2731,1574.29 2740,1583.29 2740,1735 2805,1800 Q7.2@2805,2091.46 2805,2185 2755,2235 Q7.6@2755,2305
NetCH8_OUT_1: CH8_OUT.1 Q10.2 Q10.6 | length 760.5
  Bottom Layer w10: Q10.6@4215,2300 4215,2215 4265,2165 Q10.2@4265,2086.46 4265,1835 4235,1805 4235,1578.29 CH8_OUT.1@4231,1574.29
NetCH9_OUT_1: CH9_OUT.1 Q8.2 Q8.6 | length 716.6
  Bottom Layer w10: Q8.6@5610,2263.54 5610,2170 5660,2120 Q8.2@5660,2050 5667.8,2042.2 5667.8,1582.5 CH9_OUT.1@5676,1574.29
NetCH10_OUT_1: CH10_OUT.1 Q9.2 Q9.6 | length 735.2
  Bottom Layer w6: Q9.6@6931,2292.48 6931,2204 6985,2150 6985,2082.93 6981,2078.93 6990,2069.93 CH10_OUT.1@6990,1585
NetI_BG_1: I_BG.1 Q12.2 Q12.6 | length 1059.9
  Top Layer w6: Q12.6@7313.9,1253.23 7313.9,1328.9 7363.9,1378.9 7363.9,1466.77 7363.9,1508.9 7415,1560 7855,1560 7870,1575 I_BG.1@7870,1825
NetI_SOL_G_1: I_SOL_G.1 Q11.2 Q11.6 | length 980.3
  Top Layer w6: Q11.6@7310,4026.46 7310,4172.78 7360,4222.78 7360,4276.49 7383.51,4300 7810,4300 7870,4360 I_SOL_G.1@7870,4525
NetI_TG4_1: I_TG4.1 Q13.2 Q13.6 | length 989.8
  Top Layer w6: Q13.6@7313.9,2258.23 7305,2267.13 7305,2325 7363.9,2383.9 7363.9,2471.77 7373.69,2481.57 7373.69,2525.18 7378.51,2530 7840,2530 7870,2560 I_TG4.1@7870,2740
NetI_TG6_1: I_TG6.1 Q14.2 Q14.6 | length 939
  Top Layer w6: Q14.6@7320,3161.46 7320,3240 7370,3290 Q14.2@7370,3375 7370,3392.22 7417.78,3440 7797.8,3440 7870,3512.2 I_TG6.1@7870,3650
NetR1_1: R1.1 SOL_G.1 | length 273.4
  Top Layer w6: R1.1@7384.8,4790 7384.8,4710.2 7405,4690 SOL_G.1@7405,4525
NetR3_1: R3.1 TG1.1 | length 263.2
  Top Layer w6: R3.1@7299.8,2970 7299.8,2920.2 7380,2840 TG1.1@7380,2740
NetR6_1: R6.1 TG2.1 | length 246.3
  Top Layer w6: R6.1@7335,3860 7361.61,3860 7385,3836.61 TG2.1@7385,3650
S1: B36.4 HSEC8-120-01-S-RA-TR.31 | length 5201.2
  Top Layer w6: v1(3010,3750) v1(3010,3802) ; v1(4285,4645) 4285,4604.65 HSEC8-120-01-S-RA-TR.31@4287.91,4601.73
  Bottom Layer w6: B36.4@2799.33,837.2 2727.8,837.2 2690,875 2690,1045 2745,1100 2985,1100 3020,1135 3020,2403.17 3010,2413.17 v1(3010,3750) ; v1(3010,3802) 3096.37,3888.37 3228.37,3888.37 3460,4120 3460,4460 3645,4645 v1(4285,4645)
S2: B36.13 HSEC8-120-01-S-RA-TR.8 | length 5076.9
  Top Layer w6: HSEC8-120-01-S-RA-TR.8@4665.87,4522.99 4665.87,4509.81 4667.78,4507.9 4667.78,4460.17 v1(4667.78,4465.47)
  Bottom Layer w6: B36.13@3030.67,837.2 3172.2,837.2 3250,915 3250,1110 3306,1166 4360.7,1166 4510,1315.3 4510,3732.88 4523,3745.88 4523,3943.93 4519.04,3947.89 4519.04,3948.7 4516.68,3951.06 4516.68,3951.38 4515.51,3952.55 4515.51,3970.47 4521.07,3976.03 4532,3986.97 4532,4017.46 4581,4066.46 4581,4296 4667.78,4382.78 v1@4667.78,4460.17
S3: B22.4 HSEC8-120-01-S-RA-TR.14 | length 4164.4
  Top Layer w6: v1(4345.15,1109.85) 4360,1124.7 4360,1195 v1(4358.59,1196.41) ; v1(4450,3780) 4450,3891.96 4485.61,3927.56 4487.82,3927.56 4492.26,3932 v1(4496.04,3932) ; HSEC8-120-01-S-RA-TR.14@4571.38,4522.99 4571.38,4511.18 4573.98,4508.58 4575,4507.56 v1(4575,4465)
  Bottom Layer w6: B22.4@3901.21,842.8 4172.8,842.8 4345.15,1015.15 v1(4345.15,1109.85) ; v1(4358.59,1196.41) 4360.41,1198.24 4360.41,1215.41 4494,1349 4494,3736 v1(4450,3780) ; v1(4496.04,3932) 4493.37,3934.68 4493.37,3941.07 4491.92,3942.51 4491.92,4065.06 4524,4097.14 4524,4218 4532,4226 4532,4412 4559.44,4439.44 4559.44,4445.66 4575,4461.21 v1(4575,4465)
S4: B22.13 HSEC8-120-01-S-RA-TR.20 | length 4551.7
  Top Layer w6: v1(3745,840) 3827.5,757.5 v1(3992.5,757.5) ; HSEC8-120-01-S-RA-TR.20@4476.89,4522.99 4476.89,4510.89 4479.34,4508.44 v1(4479.34,4465.58) ; v1(4485,4115) 4546.5,4053.5 4586.57,4013.43 4586.57,3988.38 4622.14,3952.8 4622.14,3809 4618.49,3805.35 4618.49,3789.68 v1(4615.81,3787)
  Bottom Layer w6: B22.13@3669.87,842.8 3671.27,841.4 3743.6,841.4 v1(3745,840) ; v1(3992.5,757.5) 3995,755 4155,755 4570,1170 4570,3717.53 4615.81,3763.34 v1(4615.81,3787) ; v1(4479.34,4465.58) 4479.34,4285.53 4469,4275.19 4469,4218.37 4483,4204.37 4483,4156.51 4485,4154.51 v1(4485,4115)
S5: B32.4 HSEC8-120-01-S-RA-TR.26 | length 3985.2
  Top Layer w6: HSEC8-120-01-S-RA-TR.26@4382.4,4522.99 4382.4,4510.86 4386.51,4506.76 v1(4386.51,4463.5) ; v1(4424,4307.97) 4424,4215.51 4550.37,4089.14 4550.86,4089.14 4677.23,3962.77 v1(4677.23,3787)
  Bottom Layer w6: v1(4386.51,4463.5) 4386.51,4345.47 v1(4424,4307.97) ; B32.4@4594.33,830.98 4509.02,830.98 4490,850 4490,1020 4605.73,1135.73 4605.73,3655.73 4677.23,3727.23 v1(4677.23,3787)
S6: B36.5 HSEC8-120-01-S-RA-TR.34 | length 4894.5
  Top Layer w6: HSEC8-120-01-S-RA-TR.34@4256.42,4522.99 4256.42,4511.18 4259.02,4508.58 4260,4507.6 v1(4260,4465.47) v1@4260,4460
  Bottom Layer w6: B36.5@2799.33,862.8 2752.2,862.8 2720,895 2720,1021.49 2773.51,1075 3000,1075 3046.08,1121.08 3046.08,3661.08 3095,3710 3170,3710 3545,4085 3545,4289.11 3625.95,4370.06 4227.44,4370.06 4260,4402.63 v1(4260,4465.47)
S7: B36.12 HSEC8-120-01-S-RA-TR.1 | length 5112
  Top Layer w6: v1(3220,985) v1(3310,985) ; HSEC8-120-01-S-RA-TR.1@4760.35,4601.73 4760.35,4589.92 4762.95,4587.32 4764.23,4586.04 v1(4791.52,4586.04)
  Bottom Layer w6: B36.12@3030.67,862.8 3097.8,862.8 v1(3220,985) ; v1(3310,985) 3473.07,1148.07 4365.4,1148.07 4526.75,1309.43 4526.75,3727.01 4539,3739.25 4539,3917.03 4549.96,3927.99 4549.96,3939.87 4561.51,3951.42 4561.51,3959.28 4629,4026.77 4629,4271.37 4790,4432.37 4790,4584.53 v1(4791.52,4586.04)
S8: B22.5 HSEC8-120-01-S-RA-TR.7 | length 4605.4
  Top Layer w6: HSEC8-120-01-S-RA-TR.7@4665.87,4601.73 4668.46,4604.33 v1(4668.46,4655.72)
  Bottom Layer w6: B22.5@3901.21,817.2 4182.2,817.2 4542.85,1177.85 4542.85,3720.47 4560,3737.63 4560,3915.4 4575.32,3930.72 4575.32,3942.6 4577.51,3944.8 4577.51,3950.04 4645,4017.53 4645,4264.75 4816.24,4435.99 4816.24,4647.75 4777.99,4686 4707.01,4686 4683.82,4662.81 4679.34,4662.81 4672.25,4655.72 v1(4668.46,4655.72)
S9: B22.12 HSEC8-120-01-S-RA-TR.13 | length 5158.8
  Top Layer w6: v1(3955,665) 4032.56,665 4037.56,670 v1(4040,670) ; v1(4570,4650) 4570,4625.31 4570.31,4625 HSEC8-120-01-S-RA-TR.13@4575,4625 ; v1(4583.3,4685.25) 4583.46,4685.41 4673.89,4685.41 v1(4674.29,4685.81) ; v1(4600,3715) 4603.79,3715 4608.72,3719.93 4609.94,3719.93 4651.17,3761.17 4651.17,3856.84 4642.3,3865.72 v1(4642.3,3965.17) ; v1(4680,4175) 4680,4197.58 4695,4212.58 v1(4695,4280)
  Bottom Layer w6: B22.12@3669.87,817.2 3712.8,817.2 3865,665 v1(3955,665) ; v1(4040,670) 4109,739 4179,739 4395,955 4395,965 4589.73,1159.73 4589.73,3704.49 4600,3714.76 v1(4600,3715) ; v1(4570,4650) 4571.79,4651.79 4571.79,4670.34 4583.3,4681.85 v1(4583.3,4685.25) ; v1(4642.3,3965.17) 4667,3989.88 4667,4161.13 4680,4174.13 v1(4680,4175) ; v1(4674.29,4685.81) 4690.48,4702 4796.61,4702 4840.09,4658.52 4840.09,4425.84 4695,4280.75 v1(4695,4280)
S10: B32.5 HSEC8-120-01-S-RA-TR.19 | length 7025.4
  Top Layer w6: v1(4475,4650) 4475,4603.62 HSEC8-120-01-S-RA-TR.19@4476.89,4601.73 ; v1(4482.68,4769.5) 4482.68,4856.18 v1(4505,4878.5) ; v1(4590.73,1070) v1(4675,1070) ; v1(5865.77,3148.49) 5865.77,3151.51 5917.94,3203.69 v1(5918.84,3203.69)
  Bottom Layer w6: v1(4475,4650) 4475,4706.16 4480,4711.16 4480,4766.82 v1(4482.68,4769.5) ; v1(4505,4878.5) 4507.68,4881.18 4507.68,4896.97 4513.21,4902.5 4513.21,4904.92 4518.29,4910 5643.94,4910 5652,4901.94 5916,4637.94 5916,4318.25 5913.5,4315.75 5913.5,4184.84 5909.5,4180.84 5909.5,3954.5 5794,3839 5794,3600.6 5920.15,3474.44 5920.15,3205 v1(5918.84,3203.69) ; v1(4590.73,1070) 4528.51,1007.79 4528.51,1005 4519,995.49 4519,876 4538.43,856.57 B32.5@4594.33,856.57 ; v1(4675,1070) 4949.13,1070 5031.24,987.89 5507.89,987.89 5870,1350 5871.49,1350 5871.49,1818.51 5869.97,1820.03 5869.97,3126.49 5866.97,3129.49 5866.97,3147.28 v1(5865.77,3148.49)
S11: B32.6 HSEC8-120-01-S-RA-TR.25 | length 6919
  Top Layer w6: v1(4381.46,4845) 4383.23,4843.23 4383.23,4801.77 v1(4385,4800) ; v1(4381.86,4655.73) 4381.86,4625.31 4382.17,4625 HSEC8-120-01-S-RA-TR.25@4385,4625
  Bottom Layer w6: v1(4381.46,4845) 4395.46,4859 4513.08,4859 4548.08,4894 5637.31,4894 5900,4631.31 5900,4324.88 5897.5,4322.38 5897.5,4191.47 5893.5,4187.47 5893.5,3988.5 5768.99,3863.99 5768.99,3602.99 5904.15,3467.82 5904.15,3221.53 5895.26,3212.63 5895.26,3194.74 5905,3185 5905,1350 5523.21,968.21 4558.51,968.21 4535,944.69 4535,905 4557.83,882.17 B32.6@4594.33,882.17 ; v1(4381.86,4655.73) 4383.43,4657.3 4383.43,4798.43 v1(4385,4800)
SOL_G: HSEC8-120-01-S-RA-TR.33 Q11.3 R1.2 | length 4070.5
  Top Layer w6: HSEC8-120-01-S-RA-TR.33@4256.42,4601.73 4263.26,4608.57 4263.26,4650.84 4317.74,4705.31 5644.69,4705.31 5790,4560 5856.79,4560 5961.29,4455.5 7045.5,4455.5 7165,4575 7165,4750 7205,4790 7281.31,4790 ; R1.2@7310,4790 7281.31,4790 ; Q11.3@7315,4256.77 7313.9,4257.87 7313.9,4351.7 7296.84,4368.76 7271.24,4368.76 7230,4410 7230,4738.69 7281.31,4790
TCK: B39.34 JTAG.7 | length 1202.2
  Top Layer w6: JTAG.7@1885,4765 2025,4905 2335.61,4905 2340.61,4900 v1(2655,4900) ; v1(2740,4800) 2742.56,4800 B39.34@2908.3,4634.26
  Bottom Layer w6: v1(2655,4900) 2737.32,4817.68 2737.32,4802.68 v1(2740,4800)
TDI: B39.32 JTAG.11 | length 1374.7
  Top Layer w6: v1(2340,4859.5) 2738.74,4859.5 B39.32@2936.14,4662.1
  Bottom Layer w6: JTAG.11@1685,4765 1687.6,4767.6 1727.5,4767.6 1769.9,4810 2295,4810 2326.69,4841.69 2326.69,4845.94 2340,4859.24 v1(2340,4859.5)
TDO: B39.31 JTAG.13 | length 1497.6
  Top Layer w6: JTAG.13@1585,4765 1685,4865 v1(1880,4865) ; v1(2015,4865) 2030.5,4880.5 2745.04,4880.5 2949.52,4676.02 B39.31@2950.06,4676.02
  Bottom Layer w6: v1(1880,4865) v1(2015,4865)
TG4: HSEC8-120-01-S-RA-TR.30 Q13.3 R3.2 | length 4928.3
  Top Layer w6: HSEC8-120-01-S-RA-TR.30@4319.41,4522.99 4319.41,4507.17 4320,4506.57 4320,4445 4354.71,4410.29 v1(7075.08,4410.29) ; v1(7155,4385) 7155,3040 R3.2@7225,2970 7215,2960 7215,2605 7310,2510 7310,2475.67 Q13.3@7313.9,2471.77
  Bottom Layer w6: v1(7075.08,4410.29) 7075.37,4410 7135,4410 7144.04,4400.96 7144.04,4398.08 7155,4387.13 v1(7155,4385)
TG6: HSEC8-120-01-S-RA-TR.36 Q14.3 R6.2 | length 4208.8
  Top Layer w6: HSEC8-120-01-S-RA-TR.36@4224.92,4522.99 4227.52,4520.39 4227.52,4442.48 4280,4390 7026.21,4390 7036.21,4380 v1(7040,4380) ; v1(7185,4335) 7185,3934.06 7233.51,3885.54 7243.51,3885.54 7260.2,3868.86 R6.2@7260.2,3860 7245.2,3845 7236.51,3845 7195,3803.49 7195,3491.77 7215.88,3470.88 7289.12,3470.88 7325,3435 7325,3386.77 Q14.3@7313.9,3386.77
  Bottom Layer w6: v1(7040,4380) 7041.33,4378.67 7101.33,4378.67 7145,4335 v1(7185,4335)
TMS: B39.33 JTAG.9 | length 1247.7
  Top Layer w6: JTAG.9@1785,4765 1850,4830 v1(1900,4830) ; v1(2000,4840) 2730.4,4840 B39.33@2922.22,4648.18
  Bottom Layer w6: v1(1900,4830) 1986.21,4830 1996.21,4840 v1(2000,4840)
pads on no net: -5V_REG.2 B39.8 B39.9 B39.10 B39.11 B39.12 B39.13 B39.16 B39.17 B39.18 B39.19 B39.20 B39.21 B39.22 B39.23 B39.24 B39.25 B39.26 B39.27 B39.28 B39.39 B39.40 B39.41 B39.42 B39.43 HSEC8-120-01-S-RA-TR. HSEC8-120-01-S-RA-TR.P1 HSEC8-120-01-S-RA-TR.P2 J1.MH1 J1.MH2 JTAG.1 JTAG.2 JTAG.4 JTAG.6 JTAG.10 JTAG.14 Q1.1 Q1.5 Q1.8 Q2.1 Q2.5 Q2.8 Q3.1 Q3.5 Q3.8 Q4.1 Q4.5 Q4.8 Q5.1 Q5.5 Q5.8 Q6.1 Q6.5 Q6.8 Q7.1 Q7.5 Q7.8 Q8.1 Q8.5 Q8.8 Q9.1 Q9.5 Q9.8 Q10.1 Q10.5 Q10.8 Q11.1 Q11.5 Q11.8 Q12.1 Q12.5 Q12.8 Q13.1 Q13.5 Q13.8 Q14.1 Q14.5 Q14.8

## Polygon pours and split planes (outlines as drawn)
GND on Top Layer "GND_L01_P076" (solid, remove dead copper, pour order 76): 0,4945 0,0 8130,0 8130,4935
Net3.3V_REG_5 on Top Layer "NET3.3V_REG_5_L01_P063" (solid, remove dead copper, pour order 63): 392.5,915 407.5,930 732.5,930 742.5,920 742.5,760 732.5,750 402.5,750 392.5,760
-5 on Top Layer "-5_L01_P075" (solid, remove dead copper, pour order 75): 1820,845 1785,810 1785,625 1795,615 1880,615 1910,645 1960,645 1965,650 1965,840 1960,845 1830,845
+5 on Top Layer "+5_L01_P073" (solid, remove dead copper, pour order 73): 1393.59,810.77 1387.82,805 1385,805 1385,655 1390,650 1516.46,650 1521.46,655 1520,656.46 1520,805 1518.08,805 1512.5,810.58
GND on Top Layer "GND_L01_P046" (solid, pour order 46): 257.5,390 257.5,220 317.5,160 882.5,160 882.5,335 827.5,390
Net3.3V_REG_1 on Top Layer "NET3.3V_REG_1_L01_P061" (solid, remove dead copper, pour order 61): 1061.81,728.19 1065,730 1203.39,730 1203.39,675.08 1193.31,665 1061.81,665
GND on Bottom Layer "GND_L06_P077" (solid, remove dead copper, pour order 77): -10,4935 -10,-5 -5,0 8130,0 8130,4930 8120,4940
GND on TOP_GND (split plane): 8109.9,20.1 20.1,20.1 20.1,4919.9 8109.9,4919.9
-5 on -5V (split plane): 8109.9,20.1 20.1,20.1 20.1,4919.9 8109.9,4919.9
+5 on +5V (split plane): 8109.9,20.1 20.1,20.1 20.1,4919.9 8109.9,4919.9
GND on BOT_GND (split plane): 8109.9,20.1 20.1,20.1 20.1,4919.9 8109.9,4919.9

## Silkscreen, mask and mechanical layers (free items; w line width, h text height)
Top Overlay:
  drawing of 58 lines, arcs and shapes, not listed
  text "Source" at 2495,100 h60
  text "POWER" at 1980,90 h60
Mechanical 1:
  lines w10: 0,0 0,4945 8130,4945 8130,0 7752.88,0 0,0

## Text inside footprints (layer, text, board x,y; h text height)
HSEC8-120-01-S-RA-TR: Mechanical 13 "PCB EDGE" at 4534.08,4919.15 h24.03 r180